# Altium PCB PCB_NEON.PcbDoc
Units mm, origin at the board's own origin, x right, y up, seen from the top; angles counter-clockwise.
Board outline 104.88 x 70.78 mm, 2 copper layers (Top Layer, Bottom Layer); 56 components, 30 nets, 168 pads, 63 vias.
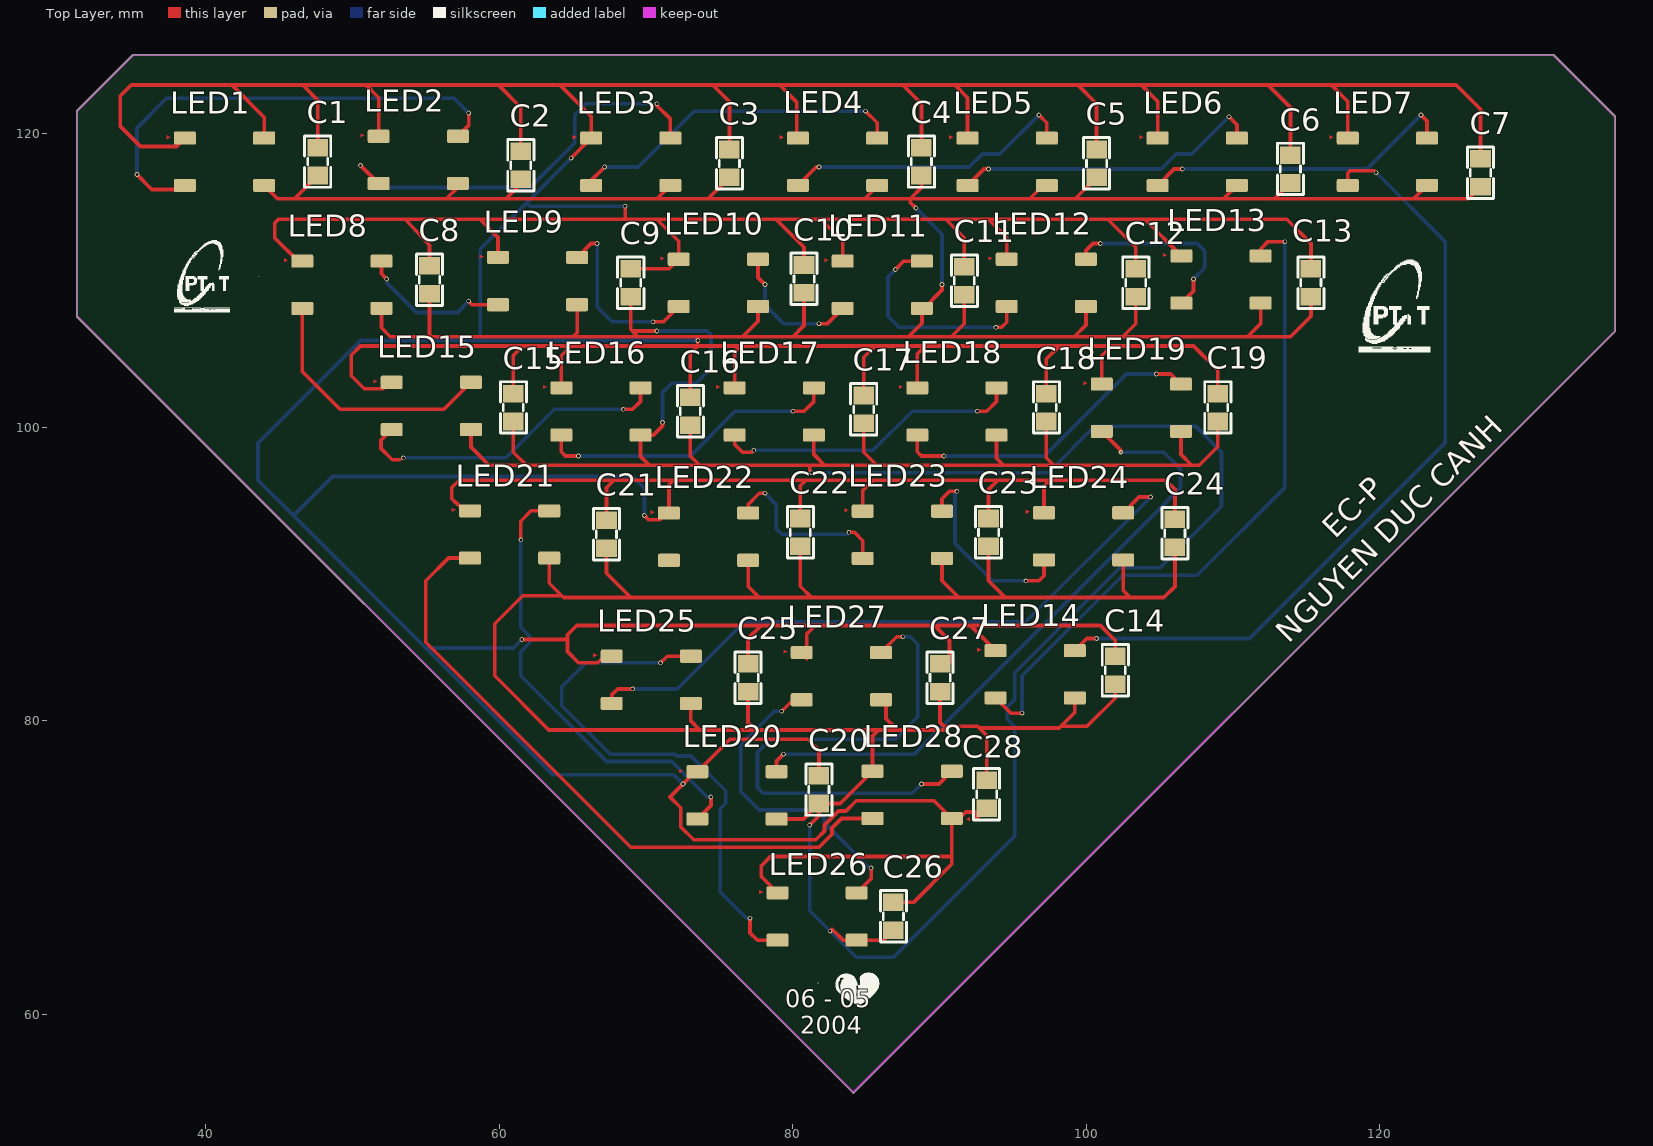
[diagram p0: Top Layer view]
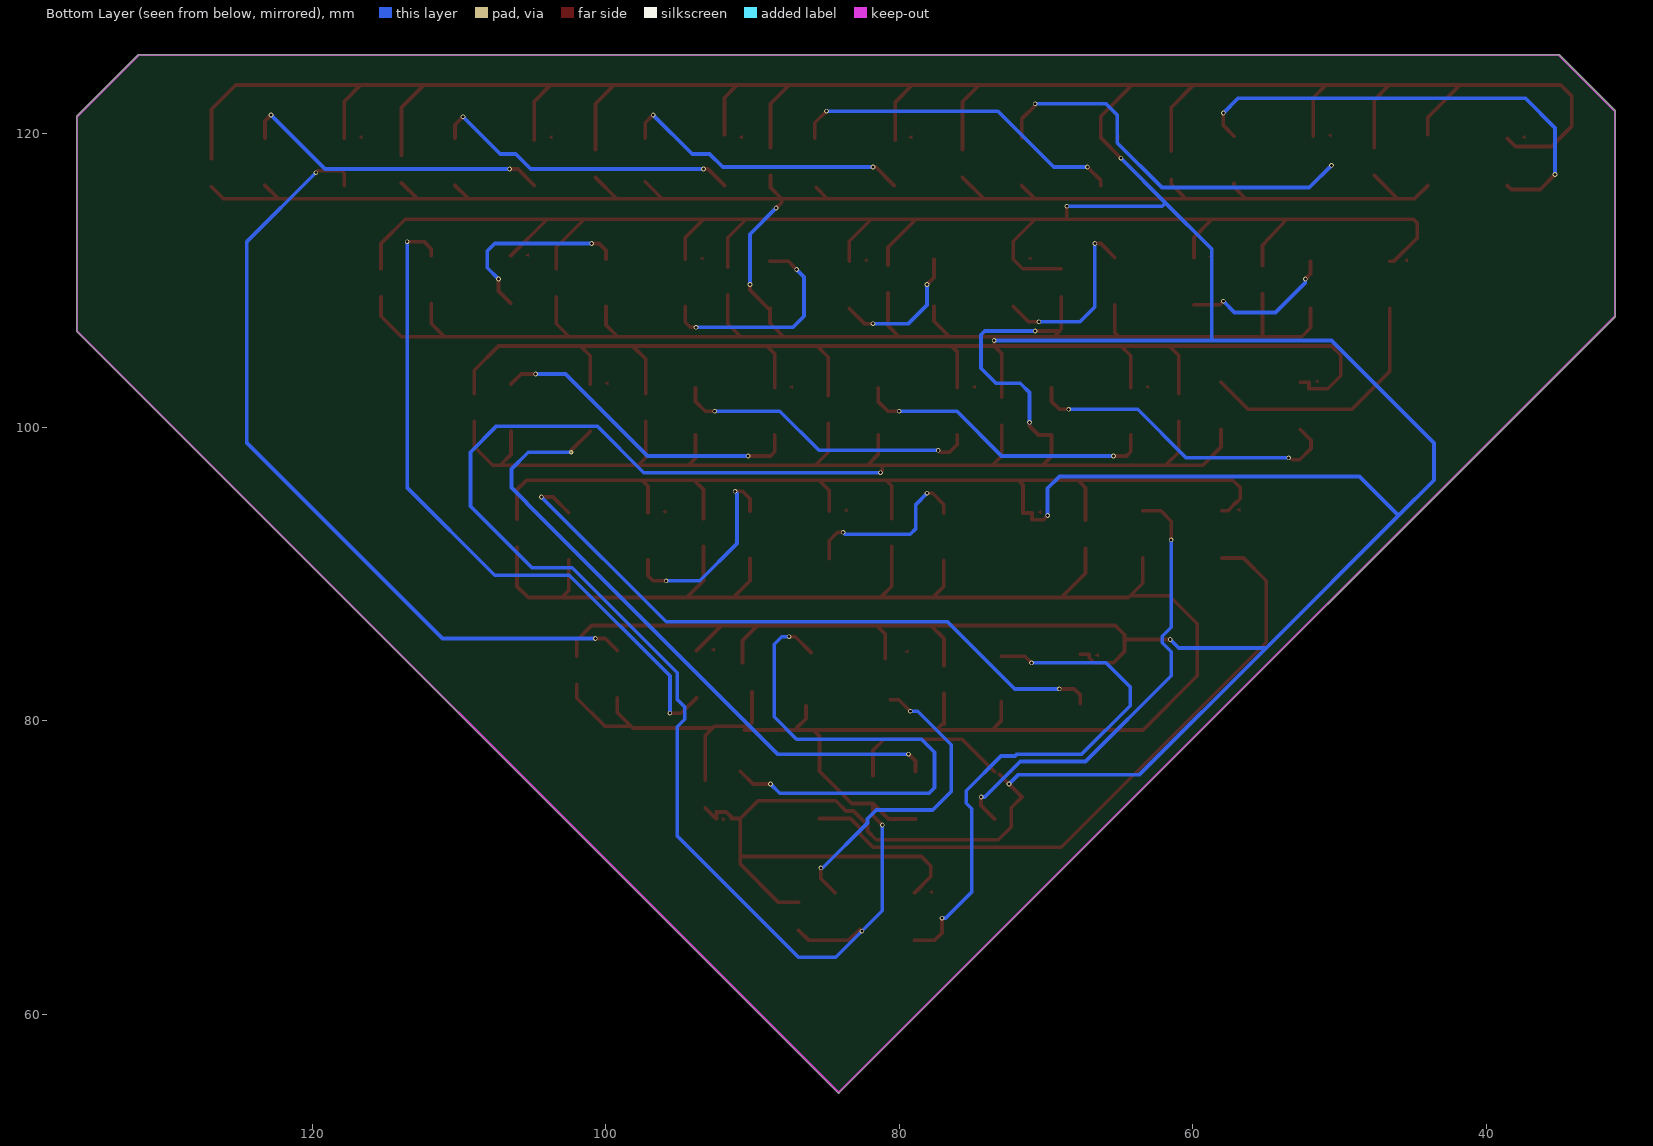
[diagram p1: Bottom Layer view, seen from below]
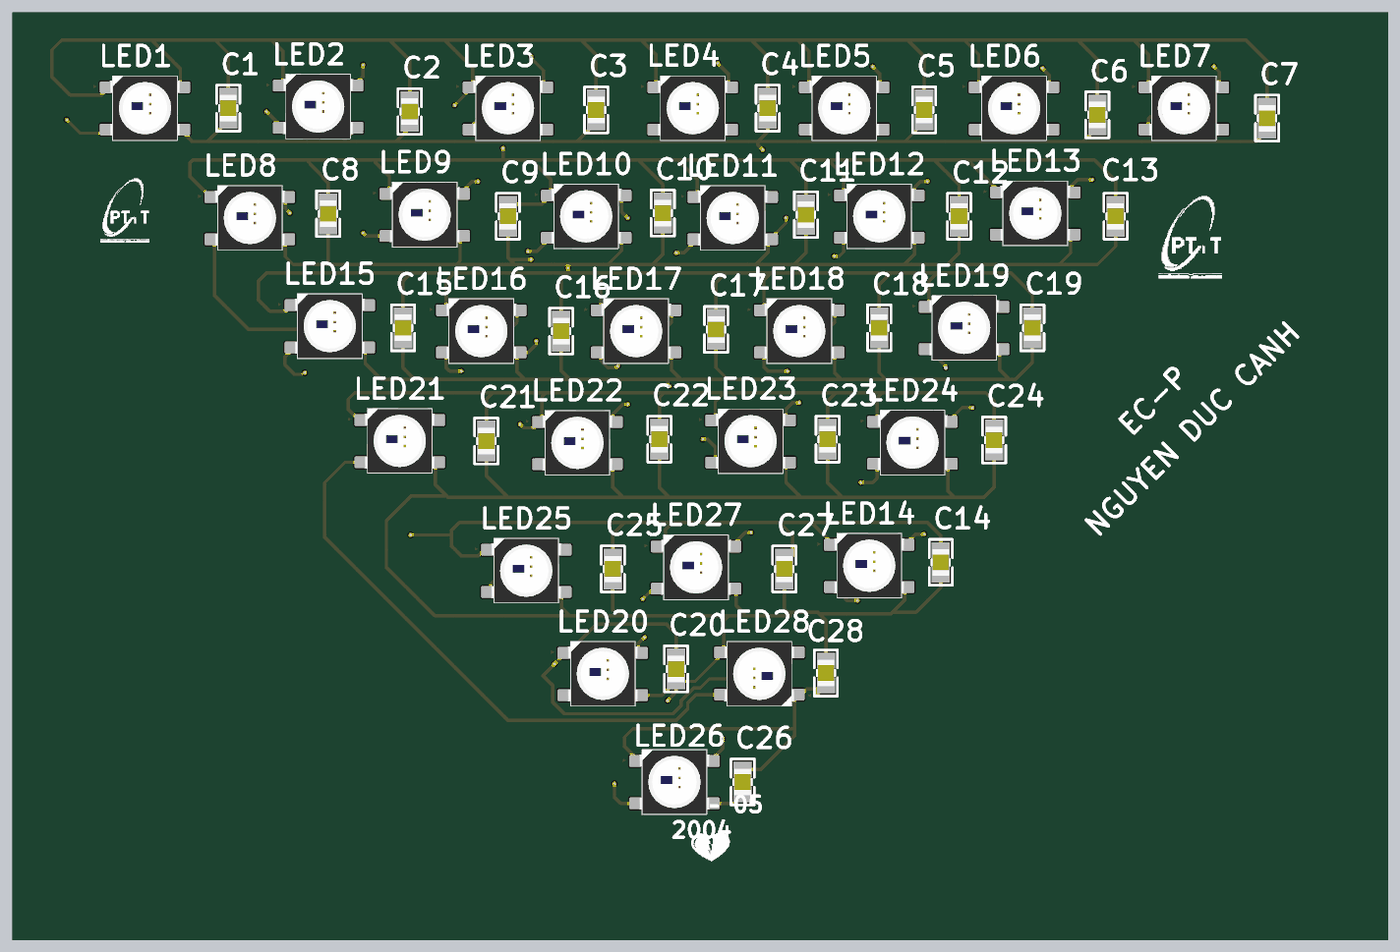
[diagram p2: 3D render of the assembled board from above, using the file's embedded part models]

## Layer stack, top to bottom
Top Solder: solder mask 0.0102, Solder Resist, Dk 3.5
Top Layer: signal copper 0.0356
Dielectric 1: dielectric 0.32, FR-4, Dk 4.8
Bottom Layer: signal copper 0.0356
Bottom Solder: solder mask 0.0102, Solder Resist, Dk 3.5

## Board outline
70.449,68.291 ccw(c70.485,68.326) 70.449,68.29 ccw(c70.485,68.326) 70.45,68.29 84.102,54.638 ccw(c84.138,54.673) 84.173,54.638 136.053,106.517 136.052,106.517 ccw(c136.017,106.553) 136.067,106.553 136.067,121.158 ccw(c136.017,121.158) 136.052,121.194 136.053,121.194 131.862,125.385 131.862,125.384 ccw(c131.826,125.349) 131.826,125.399 35.052,125.399 ccw(c35.052,125.349) 35.016,125.384 35.016,125.385 31.206,121.575 31.207,121.575 ccw(c31.242,121.539) 31.192,121.539 31.192,107.569 ccw(c31.242,107.569) 31.207,107.533 31.206,107.533

## Design rules (kind name [scope] priority, off if disabled: settings)
Clearance [All] p1: gap=0.254 ignorepadtopadclearanceinfootprint=FALSE except(0: Arc-Hole Track-Hole SMDPad-Hole THPad-Hole Via-Hole Fill-Hole Poly-Hole Region-Hole Text-Hole)
PolygonConnect [All] p1: connectstyle=Relief reliefconductorwidth=0.254 reliefentries=4 polygonreliefangle="90 Angle" airgapwidth=0.254
RoutingVias [All] p1: holewidth=0.711 width=1.27 viastyle="Through Hole" minholewidth=0.711 minwidth=1.27 maxholewidth=0.711 maxwidth=1.27
SolderMaskExpansion [All] p1: expansion=0.102 istentingtop=FALSE
Width [All] p1: maxlimit=0.254 minlimit=0.254 preferedwidth=0.254
30 further rules are at their usual default settings.

## Components (designator, comment, footprint, x,y, rotation, side; value= is the part's Value field where it differs from the comment)
C1 "104" "tu 0805" 47.625,118.11 r270 top
C2 "104" "tu 0805" 61.468,117.856 r270 top
C3 "104" "tu 0805" 75.692,117.983 r270 top
C4 "104" "tu 0805" 88.773,118.11 r270 top
C5 "104" "tu 0805" 100.711,117.983 r270 top
C6 "104" "tu 0805" 113.919,117.602 r270 top
C7 "104" "tu 0805" 126.873,117.348 r270 top
C8 "104" "tu 0805" 55.248,110.052 r270 top
C9 "104" "tu 0805" 68.961,109.855 r270 top
C10 "104" "tu 0805" 80.772,110.109 r270 top
C11 "104" "tu 0805" 91.694,109.982 r270 top
C12 "104" "tu 0805" 103.378,109.855 r270 top
C13 "104" "tu 0805" 115.316,109.855 r270 top
C14 "104" "tu 0805" 101.981,83.439 r270 top
C15 "104" "tu 0805" 60.96,101.346 r270 top
C16 "104" "tu 0805" 73.025,101.092 r270 top
C17 "104" "tu 0805" 84.836,101.219 r270 top
C18 "104" "tu 0805" 97.282,101.346 r270 top
C19 "104" "tu 0805" 108.966,101.346 r270 top
C20 "104" "tu 0805" 81.788,75.311 r270 top
C21 "104" "tu 0805" 67.31,92.71 r270 top
C22 "104" "tu 0805" 80.518,92.837 r270 top
C23 "104" "tu 0805" 93.345,92.837 r270 top
C24 "104" "tu 0805" 106.048,92.78 r270 top
C25 "104" "tu 0805" 76.962,82.931 r270 top
C26 "104" "tu 0805" 86.868,66.675 r270 top
C27 "104" "tu 0805" 90.043,82.931 r270 top
C28 "104" "tu 0805" 93.215,74.992 r90 top
LED1 "WS2812B" LED 41.275,117.602 r0 top
LED2 "WS2812B" LED 54.483,117.729 r0 top
LED3 "WS2812B" LED 68.961,117.602 r0 top
LED4 "WS2812B" LED 83.058,117.602 r0 top
LED5 "WS2812B" LED 94.615,117.602 r0 top
LED6 "WS2812B" LED 107.569,117.602 r0 top
LED7 "WS2812B" LED 120.523,117.602 r0 top
LED8 "WS2812B" LED 49.276,109.22 r0 top
LED9 "WS2812B" LED 62.611,109.474 r0 top
LED10 "WS2812B" LED 74.93,109.347 r0 top
LED11 "WS2812B" LED 86.106,109.22 r0 top
LED12 "WS2812B" LED 97.282,109.347 r0 top
LED13 "WS2812B" LED 109.187,109.578 r0 top
LED14 "WS2812B" LED 96.52,82.677 r0 top
LED15 "WS2812B" LED 55.372,100.965 r0 top
LED16 "WS2812B" LED 66.929,100.584 r0 top
LED17 "WS2812B" LED 78.74,100.584 r0 top
LED18 "WS2812B" LED 91.186,100.584 r0 top
LED19 "WS2812B" LED 103.759,100.838 r0 top
LED20 "WS2812B" LED 76.2,74.422 r0 top
LED21 "WS2812B" LED 60.706,92.202 r0 top
LED22 "WS2812B" LED 74.262,92.052 r0 top
LED23 "WS2812B" LED 87.47,92.179 r0 top
LED24 "WS2812B" LED 99.822,92.075 r0 top
LED25 "WS2812B" LED 70.358,82.296 r0 top
LED26 "WS2812B" LED 81.661,66.167 r0 top
LED27 "WS2812B" LED 83.312,82.55 r0 top
LED28 "WS2812B" LED 88.138,75.438 r180 top

## Footprints (in the part's own frame and the unit in brackets; to place one, negate y for a bottom-side part, rotate by r counter-clockwise, add the part's x,y. Pads: shape width x height; smd on the part's side, far side on the other; paste and mask are expansions set on the pad)
LED [mm]
  rrect25% 1.5x0.9 smd: 1(-2.7,2.1) 2(-2.7,-1.12) 3(2.7,-1.12) 4(2.7,2.1)
  Top Layer region: -3.937,2.286 -3.937,2.032 -3.683,2.159
  body extent -2.7,-1.99 2.7,3.01, height 1.8
"tu 0805" [mm] "Compoment SMD 80x50mil"
  rect 1.2x1.4 smd: 1(-0.946,-0.003) 2(0.954,-0.003)
  silkscreen extent -1.75,-0.89 1.75,0.89, body extent -1.01,-0.64 1.01,0.63, height 0.61

## Part data
C1 C2 C3 C4 C5 C6 C7 C8 C9 C10 C11 C12 C13 C14 C15 C16 C17 C18 C19 C20 C21 C22 C23 C24 C25 C26 C27 C28: library part "Tu 0805 104 50V 10%", "Dán", Chung_Loai=Dán, Don_Vi=Con, Ma_Hang=MH004551, So_Chan=2, Ten_Linh_Kien="T? 0805 104-100nF 10% 50V"

## Via types
v1: diameter 0.32, hole 0.2, Top Layer to Bottom Layer, 62 vias
v2: diameter 0.32, hole 0, Top Layer to Bottom Layer, 1 vias

## Nets (pads, with @x,y where several pads share a name; then routed paths per layer and width w, separated by ;. In a path a pad name is that pad's centre, name@x,y a point inside that pad or via, vN(x,y) a via of type N, cw(c..) or ccw(c..) an arc to the next point about the centre after c; other vN are vias at no path point)
5V+: C1.1 C2.1 C3.1 C4.1 C5.1 C6.1 C7.1 C8.1 C9.1 C10.1 C11.1 C12.1 C13.1 C14.1 C15.1 C16.1 C17.1 C18.1 C19.1 C20.1 C21.1 C22.1 C23.1 C24.1 C25.1 C26.1 C27.1 C28.1 LED1.1 LED1.4 LED2.1 LED3.1 LED4.1 LED5.1 LED6.1 LED7.1 LED8.1 LED9.1 LED10.1 LED11.1 LED12.1 LED13.1 LED14.1 LED15.1 LED16.1 LED17.1 LED18.1 LED19.1 LED20.1 LED21.1 LED22.1 LED23.1 LED24.1 LED25.1 LED26.1 LED27.1 LED28.1 | length 694.4
  Top Layer w0.254: LED1.1 37.999,119.126 35.56,119.126 34.163,120.523 34.163,122.555 34.925,123.317 41.783,123.317 ; LED1.4@43.975,119.956 43.975,121.125 41.783,123.317 ; LED8.1 46.287,111.32 44.704,112.903 44.704,113.919 44.958,114.173 53.594,114.173 ; C1.1 47.622,122.304 46.609,123.317 ; LED2.1 51.783,122.461 50.927,123.317 ; LED15.1 52.07,103.065 52.07,102.616 50.8,102.616 49.911,103.505 49.911,104.902 50.546,105.537 61.595,105.537 ; C8.1 55.245,112.395 53.594,114.173 ; LED21.1 57.59,94.302 57.404,94.488 57.404,94.519 57.054,94.869 57.023,94.869 56.769,95.123 56.769,95.885 57.277,96.393 67.818,96.393 ; LED9.1 59.911,112.936 58.801,114.046 58.801,114.173 ; C15.1 60.957,104.899 61.595,105.537 ; C2.1 61.465,121.796 59.944,123.317 ; v1(61.531,85.534) 64.643,85.534 ; LED16.1 64.229,104.869 64.897,105.537 ; v1(64.897,118.338) LED3.1 66.261,121.191 64.135,123.317 ; C21.1 67.307,95.882 67.818,96.393 ; LED25.1@67.658,84.523 67.056,84.523 67.056,84.297 66.706,83.947 65.405,83.947 64.643,84.709 64.643,85.534 ; v1(68.58,115.062) 68.58,114.173 ; C9.1 71.584,110.801 LED10.1 72.23,112.682 70.739,114.173 ; v1(69.89,93.98) 70.167,93.703 70.96,93.703 70.96,94.152 LED22.1 71.562,96.073 71.882,96.393 ; C16.1 73.022,105.026 73.533,105.537 ; LED20.1@73.185,76.36 v1(72.517,75.692) 71.628,74.803 72.369,74.062 72.369,72.76 73.247,71.882 81.574,71.882 82.169,72.477 82.169,72.902 83.113,73.846 83.625,73.846 84.328,74.549 89.627,74.549 LED28.1 ; LED20.1 75.718,78.74 81.026,78.74 81.785,77.981 C20.1 ; v1(73.533,105.918) 73.533,105.537 ; C3.1 75.689,122.177 74.549,123.317 ; LED17.1 76.04,105.123 76.454,105.537 ; C25.1@76.959,83.75 C25.1 76.959,85.595 77.851,86.487 ; LED26.1 77.851,69.377 77.851,70.104 78.486,70.739 90.838,70.739 ; LED4.1@80.264,119.552 80.264,122.174 79.121,123.317 ; C22.1 80.515,96.009 80.899,96.393 ; C10.1 80.769,112.271 78.867,114.173 ; LED27.1@80.96,84.246 80.96,85.913 81.534,86.487 ; LED11.1 83.406,112.682 81.915,114.173 ; LED23.1 84.77,95.692 85.471,96.393 ; C17.1 84.833,104.772 85.598,105.537 ; C26.1 88.228,67.621 90.838,70.231 90.838,70.739 ; LED18.1 88.486,104.996 89.027,105.537 ; C4.1 88.77,122.05 87.503,123.317 ; C27.1@90.678,83.942 90.678,85.471 89.662,86.487 ; C11.1 91.691,112.906 90.424,114.173 ; LED5.1@91.915,119.956 91.915,122.461 91.059,123.317 ; C28.1 92.51,73.338 92.456,73.338 92.456,73.787 91.79,73.787 91.44,73.437 91.44,73.338 LED28.1 ; C23.1 93.342,95.755 93.98,96.393 ; LED14.1 92.11,86.487 ; LED12.1 94.582,112.936 93.345,114.173 ; LED24.1 97.122,95.979 97.536,96.393 ; C18.1 97.279,104.645 98.171,105.537 ; C5.1 100.708,122.05 99.441,123.317 ; LED19.1 101.059,104.869 101.727,105.537 ; C14.1 101.978,85.474 100.965,86.487 92.11,86.487 ; C12.1 103.375,112.271 101.473,114.173 ; LED6.1@104.869,119.575 LED6.1 104.869,122.207 103.759,123.317 ; C24.1 106.045,95.758 105.41,96.393 97.536,96.393 ; LED13.1 103.992,114.173 ; C19.1 108.963,103.889 107.315,105.537 101.727,105.537 ; C6.1 113.916,121.796 112.395,123.317 ; C13.1 115.313,112.525 113.665,114.173 103.992,114.173 ; LED7.1 117.823,122.207 116.713,123.317 ; C7.1 126.87,121.669 125.222,123.317 116.713,123.317 ; 41.783,123.317 46.609,123.317 ; 46.609,123.317 50.927,123.317 ; 50.927,123.317 59.944,123.317 ; 53.594,114.173 58.801,114.173 ; 58.801,114.173 68.58,114.173 ; 59.944,123.317 64.135,123.317 ; 61.595,105.537 64.897,105.537 ; 64.135,123.317 74.549,123.317 ; 64.643,85.534 64.643,85.852 65.278,86.487 77.851,86.487 ; 64.897,105.537 73.533,105.537 ; 67.818,96.393 71.882,96.393 ; 68.58,114.173 70.739,114.173 ; 70.739,114.173 78.867,114.173 ; 71.882,96.393 80.899,96.393 ; 73.533,105.537 76.454,105.537 ; 74.549,123.317 79.121,123.317 ; 76.454,105.537 85.598,105.537 ; 77.851,86.487 81.534,86.487 ; 78.867,114.173 81.915,114.173 ; 79.121,123.317 87.503,123.317 ; 80.899,96.393 85.471,96.393 ; 81.534,86.487 89.662,86.487 ; 81.915,114.173 90.424,114.173 ; 85.471,96.393 93.98,96.393 ; 85.598,105.537 89.027,105.537 ; 87.503,123.317 91.059,123.317 ; 89.027,105.537 98.171,105.537 ; 89.662,86.487 92.11,86.487 ; 90.424,114.173 93.345,114.173 ; 90.838,70.739 LED28.1 ; 91.059,123.317 99.441,123.317 ; 93.345,114.173 101.473,114.173 ; 93.98,96.393 97.536,96.393 ; 98.171,105.537 101.727,105.537 ; 99.441,123.317 103.759,123.317 ; 101.473,114.173 103.992,114.173 ; 103.759,123.317 112.395,123.317 ; 112.395,123.317 116.713,123.317
  Bottom Layer w0.254: v1(61.531,85.534) 60.96,84.963 54.991,84.963 ; v1(64.897,118.338) 61.849,115.29 ; v1(68.58,115.062) 62.077,115.062 61.849,115.29 ; v1(69.89,93.98) 69.89,95.845 69.088,96.647 48.641,96.647 45.974,93.98 ; v1(72.517,75.692) 71.882,76.327 63.627,76.327 54.991,84.963 ; v1(73.533,105.918) 58.801,105.918 ; 45.974,93.98 43.561,96.393 43.561,98.933 50.546,105.918 58.801,105.918 ; 45.974,93.98 54.991,84.963 ; 58.801,105.918 58.7,106.019 58.7,112.141 61.849,115.29
Do: LED22.2
GND: C1.2 C2.2 C3.2 C4.2 C5.2 C6.2 C7.2 C8.2 C9.2 C10.2 C11.2 C12.2 C13.2 C14.2 C15.2 C16.2 C17.2 C18.2 C19.2 C20.2 C21.2 C22.2 C23.2 C24.2 C25.2 C26.2 C27.2 C28.2 LED1.3 LED2.3 LED3.3 LED4.3 LED5.3 LED6.3 LED7.3 LED8.3 LED9.3 LED10.3 LED11.3 LED12.3 LED13.3 LED14.3 LED15.3 LED16.3 LED17.3 LED18.3 LED19.3 LED20.3 LED21.3 LED22.3 LED23.3 LED24.3 LED25.3 LED26.3 LED27.3 LED28.3 | length 544.8
  Top Layer w0.254: LED1.3 44.887,115.57 46.036,115.57 ; C1.2 46.036,115.57 ; LED8.3 51.976,106.774 52.578,106.172 55.245,106.172 ; C8.2 55.245,106.172 ; LED2.3 57.183,116.365 56.388,115.57 ; LED15.3 58.072,98.646 59.309,97.409 61.849,97.409 ; C15.2 60.957,98.301 61.849,97.409 ; C2.2 61.465,116.583 60.452,115.57 ; LED21.3 63.406,89.375 64.262,88.519 ; LED9.3 65.311,106.459 65.024,106.172 ; C21.2 67.307,90.046 68.961,88.392 ; C9.2 68.958,106.683 69.088,106.553 ; v1(70.739,106.553) 69.088,106.553 ; v1(71.12,100.33) 71.12,100.076 70.508,99.464 LED16.3 69.629,98.011 70.231,97.409 ; LED3.3 70.749,115.57 ; C16.2 73.022,98.047 73.66,97.409 ; LED25.3@73.058,81.303 LED25.3 73.058,79.977 73.66,79.375 ; C3.2 74.23,115.57 ; C25.2@76.959,81.85 76.959,79.759 77.086,79.759 77.47,79.375 ; LED22.3 76.962,89.154 77.724,88.392 ; LED10.3 77.63,107.221 76.581,106.172 ; LED20.3 80.73,73.302 C20.2 ; C22.2 80.515,89.157 81.28,88.392 ; C10.2 80.769,106.931 80.01,106.172 ; v1(81.153,72.898) 81.785,73.53 C20.2 ; v1(81.28,96.901) 81.153,97.028 81.153,97.409 ; LED17.3 81.44,98.138 82.169,97.409 ; 82.677,65.786 83.416,65.047 LED26.3 86.191,65.047 C26.2 ; C17.2 84.833,98.301 85.725,97.409 ; LED4.3@85.664,116.332 84.902,115.57 ; LED27.3@86.36,81.026 86.36,80.137 86.995,79.502 86.995,79.375 ; v1(88.392,114.935) 88.011,115.316 88.011,115.57 ; C4.2 88.77,116.329 88.011,115.57 ; C27.2 90.04,79.886 90.295,79.631 ; LED23.3 90.17,89.535 91.313,88.392 ; v1(90.17,109.728) 90.17,109.347 88.923,108.1 LED11.3 88.806,107.094 87.884,106.172 ; C11.2 91.691,107.058 90.805,106.172 ; C28.2 93.218,78.996 92.712,79.502 ; C23.2 93.342,89.538 94.488,88.392 ; LED18.3 93.886,97.884 94.361,97.409 ; C18.2 97.279,97.92 97.79,97.409 ; LED5.3@97.315,116.736 96.149,115.57 ; LED14.3 99.22,80.553 98.298,79.631 ; LED12.3 99.982,106.967 99.187,106.172 ; C5.2 99.249,115.57 ; C14.2 101.978,81.531 100.078,79.631 98.298,79.631 ; LED24.3 102.522,88.867 102.997,88.392 ; C12.2 103.375,107.058 102.489,106.172 ; C24.2 106.045,89.154 105.283,88.392 102.997,88.392 ; LED19.3 106.459,98.138 107.188,97.409 ; C19.2 108.963,98.676 107.696,97.409 107.188,97.409 ; LED6.3 109.357,115.57 ; LED13.3 111.887,107.061 110.998,106.172 ; C6.2 112.838,115.57 ; C13.2 115.313,107.566 113.919,106.172 110.998,106.172 ; LED7.3 122.311,115.57 ; C7.2 126.046,115.57 122.311,115.57 ; 46.036,115.57 56.388,115.57 ; 55.245,106.172 65.024,106.172 ; 56.388,115.57 60.452,115.57 ; 60.452,115.57 70.749,115.57 ; 61.849,97.409 70.231,97.409 ; 64.262,88.519 61.595,88.519 59.69,86.614 59.69,83.058 63.373,79.375 73.66,79.375 ; 64.262,88.519 64.389,88.392 68.961,88.392 ; 65.024,106.172 69.469,106.172 ; 68.961,88.392 77.724,88.392 ; 69.088,106.553 69.469,106.172 ; 69.469,106.172 76.581,106.172 ; 70.231,97.409 73.66,97.409 ; 70.749,115.57 74.23,115.57 ; 73.66,79.375 77.47,79.375 ; 73.66,97.409 81.153,97.409 ; 74.23,115.57 84.902,115.57 ; 76.581,106.172 80.01,106.172 ; 77.47,79.375 85.852,79.375 ; 77.724,88.392 81.28,88.392 ; 80.01,106.172 87.884,106.172 ; 81.153,97.409 82.169,97.409 ; 81.28,88.392 91.313,88.392 ; C20.2 83.237,74.357 LED28.3 85.438,78.961 85.852,79.375 ; 82.169,97.409 85.725,97.409 ; 84.902,115.57 88.011,115.57 ; 85.725,97.409 94.361,97.409 ; 85.852,79.375 86.995,79.375 ; 86.995,79.375 90.551,79.375 90.295,79.631 ; 87.884,106.172 90.805,106.172 ; 88.011,115.57 96.149,115.57 ; 90.295,79.631 92.583,79.631 92.712,79.502 ; 90.805,106.172 99.187,106.172 ; 91.313,88.392 94.488,88.392 ; 92.712,79.502 98.169,79.502 98.298,79.631 ; 94.361,97.409 97.79,97.409 ; 94.488,88.392 102.997,88.392 ; 96.149,115.57 99.249,115.57 ; 97.79,97.409 107.188,97.409 ; 99.187,106.172 102.489,106.172 ; 99.249,115.57 109.357,115.57 ; 102.489,106.172 110.998,106.172 ; 109.357,115.57 112.838,115.57 ; 112.838,115.57 122.311,115.57
  Bottom Layer w0.254: v1(70.739,106.553) 74.168,106.553 74.422,106.299 74.422,104.013 73.406,102.997 71.755,102.997 71.12,102.362 v1(71.12,100.33) ; v1(81.153,72.898) 81.153,67.056 v1(82.55,65.659) 84.328,63.881 86.868,63.881 95.123,72.136 95.123,79.589 94.615,80.097 94.615,80.939 95.123,81.447 95.123,83.268 102.279,90.424 105.029,90.424 109.22,94.615 109.22,98.298 107.442,100.076 100.584,100.076 97.409,96.901 v1(81.28,96.901) ; v1(88.392,114.935) 90.17,113.157 v1(90.17,109.728)
NetLED1_2: LED1.2 LED2.4 | length 32.7
  Top Layer w0.254: v1(35.306,117.221) 36.322,116.205 38.298,116.205 LED1.2 ; LED2.4 57.912,120.558 v1(57.912,121.412)
  Bottom Layer w0.254: v1(35.306,117.221) 35.306,120.396 37.338,122.428 56.896,122.428 v1(57.912,121.412)
NetLED2_2: LED2.2 LED3.4 | length 28.8
  Top Layer w0.254: v1(50.546,117.846) LED2.2 ; v1(70.739,122.047) 70.739,121.92 71.661,120.998 LED3.4
  Bottom Layer w0.254: v1(50.546,117.846) 52.06,116.332 62.103,116.332 65.151,119.38 65.151,121.285 65.913,122.047 v1(70.739,122.047)
NetLED3_2: LED3.2 LED4.4 | length 23.2
  Top Layer w0.254: LED3.2 66.261,116.807 v1(67.183,117.729) ; v1(84.963,121.539) 85.758,120.744 LED4.4
  Bottom Layer w0.254: v1(67.183,117.729) 69.469,117.729 73.279,121.539 v1(84.963,121.539)
NetLED4_2: LED4.2 LED5.4 | length 20.2
  Top Layer w0.254: LED4.2 81.605,117.729 v1(81.788,117.729) ; v1(96.774,121.285) 97.315,120.744 LED5.4
  Bottom Layer w0.254: v1(81.788,117.729) 92.035,117.729 92.924,118.618 94.107,118.618 v1(96.774,121.285)
NetLED5_2: LED5.2 LED6.4 | length 21.4
  Top Layer w0.254: LED5.2 93.035,117.602 v1(93.345,117.602) ; v1(109.728,121.158) 110.269,120.617 LED6.4
  Bottom Layer w0.254: v1(93.345,117.602) 105.116,117.602 106.132,118.618 107.188,118.618 v1(109.728,121.158)
NetLED6_2: LED6.2 LED7.4 | length 21.7
  Top Layer w0.254: LED6.2 105.989,117.602 v1(106.553,117.602) ; v1(122.809,121.285) 123.223,120.871 LED7.4
  Bottom Layer w0.254: v1(106.553,117.602) 119.126,117.602 v1(122.809,121.285)
NetLED7_2: LED7.2 LED14.4 | length 54.2
  Top Layer w0.254: LED14.4 100.041,85.598 v1(100.711,85.598) ; LED7.2 117.823,117.315 117.983,117.475 119.634,117.475
  Bottom Layer w0.254: v1(100.711,85.598) 111.125,85.598 124.46,98.933 124.46,112.649 v1(119.761,117.348)
NetLED8_2: LED8.2 LED15.4 | length 17.6
  Top Layer w0.254: LED8.2 46.576,103.792 49.149,101.219 56.226,101.219 LED15.4
NetLED8_4: LED8.4 LED9.2 | length 10.4
  Top Layer w0.254: LED8.4 51.976,110.457 v1(52.324,110.109) ; v1(57.912,108.585) 58.143,108.354 LED9.2
  Bottom Layer w0.254: v1(52.324,110.109) 52.324,109.855 54.356,107.823 57.15,107.823 v1(57.912,108.585)
NetLED9_4: LED9.4 LED10.2 | length 12.5
  Top Layer w0.254: LED9.4 66.259,112.522 v1(66.675,112.522) ; v1(70.485,107.188) 71.191,107.188 LED10.2
  Bottom Layer w0.254: v1(66.675,112.522) 66.675,108.204 67.691,107.188 v1(70.485,107.188)
NetLED10_4: LED10.4 LED11.2 | length 9.6
  Top Layer w0.254: LED10.4 77.63,110.203 v1(78.105,109.728) ; v1(81.788,107.061) 82.367,107.061 LED11.2
  Bottom Layer w0.254: v1(78.105,109.728) 78.105,108.331 79.375,107.061 v1(81.788,107.061)
NetLED11_4: LED11.4 LED12.2 | length 15.1
  Top Layer w0.254: v1(86.995,110.744) 87.571,111.32 LED11.4 ; v1(93.853,106.807) 94.234,106.807 94.582,107.155 LED12.2
  Bottom Layer w0.254: v1(86.995,110.744) 86.487,110.236 86.487,107.569 87.249,106.807 v1(93.853,106.807)
NetLED12_4: LED12.4 LED13.2 | length 13.3
  Top Layer w0.254: LED12.4 99.982,112.047 100.457,112.522 v1(100.965,112.522) ; LED13.2 107.315,109.286 v1(107.315,110.109)
  Bottom Layer w0.254: v1(100.965,112.522) 107.569,112.522 108.077,112.014 108.077,110.871 v1(107.315,110.109)
NetLED13_4: LED13.4 LED14.2 | length 47.1
  Top Layer w0.254: LED14.2 94.859,80.518 v1(95.631,80.518) ; LED13.4 111.887,112.141 112.395,112.649 v1(113.538,112.649)
  Bottom Layer w0.254: v1(95.631,80.518) 95.631,83.058 102.489,89.916 107.569,89.916 113.538,95.885 v1(113.538,112.649)
NetLED15_2: LED15.2 LED16.4 | length 21.9
  Top Layer w0.254: LED15.2 51.943,99.116 51.943,98.552 52.705,97.79 53.213,97.79 ; v1(68.453,101.219) 69.088,101.219 69.629,101.76 LED16.4
  Bottom Layer w0.254: v1(53.467,97.917) 60.452,97.917 63.754,101.219 v1(68.453,101.219)
NetLED16_2: LED16.2 LED17.4 | length 20.9
  Top Layer w0.254: LED16.2 64.229,98.331 64.516,98.044 v1(65.405,98.044) ; v1(80.01,101.092) 80.772,101.092 81.44,101.76 LED17.4
  Bottom Layer w0.254: v1(65.405,98.044) 73.025,98.044 76.073,101.092 v1(80.01,101.092)
NetLED17_2: LED17.2 LED18.4 | length 20.9
  Top Layer w0.254: LED17.2 76.04,98.839 76.581,98.298 77.216,98.298 ; v1(92.583,101.092) 93.218,101.092 93.886,101.76 LED18.4
  Bottom Layer w0.254: v1(77.343,98.425) 85.471,98.425 88.138,101.092 v1(92.583,101.092)
NetLED18_2: LED18.2 LED19.4 | length 21.8
  Top Layer w0.254: LED18.2 88.486,98.331 88.773,98.044 v1(90.297,98.044) ; v1(104.775,103.632) 105.765,103.632 LED19.4
  Bottom Layer w0.254: v1(90.297,98.044) 97.155,98.044 102.743,103.632 v1(104.775,103.632)
NetLED19_2: LED19.2 LED20.4 | length 43.8
  Top Layer w0.254: LED20.4 78.9,77.249 v1(79.375,77.724) ; LED19.2 102.362,98.415 v2(102.362,98.298)
  Bottom Layer w0.254: v1(79.375,77.724) 88.305,77.724 105.41,94.829 105.41,94.869 106.426,95.885 106.426,97.155 105.283,98.298 v2(102.362,98.298)
NetLED20_2: LED20.2 LED21.4 | length 31.5
  Top Layer w0.254: v1(61.468,92.329) 61.468,93.599 62.171,94.302 LED21.4 ; LED20.2 74.422,74.224 v1(74.422,74.803)
  Bottom Layer w0.254: v1(61.468,92.329) 61.468,86.363 62.072,85.759 62.072,85.31 61.468,84.706 61.468,83.058 67.31,77.216 71.758,77.216 73.058,75.916 73.058,75.913 74.168,74.803 v1(74.422,74.803)
NetLED21_2: LED21.2 LED28.4 | length 45.1
  Top Layer w0.254: LED21.2 56.538,91.082 54.991,89.535 54.991,85.344 68.961,71.374 81.784,71.374 82.677,72.267 82.677,72.692 83.323,73.338 LED28.4
NetLED22_4: LED22.4 LED23.2 | length 12.3
  Top Layer w0.254: LED22.4 76.962,94.742 77.724,95.504 v1(78.105,95.504) ; v1(83.82,92.837) 84.201,92.837 84.77,92.268 LED23.2
  Bottom Layer w0.254: v1(78.105,95.504) 78.867,94.742 78.867,93.091 79.248,92.71 83.693,92.71 v1(83.82,92.837)
NetLED23_4: LED23.4 LED24.2 | length 14
  Top Layer w0.254: LED23.4 90.17,95.123 90.678,95.631 v1(91.186,95.631) ; v1(95.885,89.535) 96.774,89.535 97.122,89.883 LED24.2
  Bottom Layer w0.254: v1(91.186,95.631) 91.059,95.504 91.059,92.075 93.599,89.535 v1(95.885,89.535)
NetLED24_4: LED24.4 LED25.2 | length 45.2
  Top Layer w0.254: LED25.2 67.658,81.755 68.072,82.169 v1(69.088,82.169) ; LED24.4 103.597,95.25 v1(104.394,95.25)
  Bottom Layer w0.254: v1(69.088,82.169) 72.136,82.169 76.708,86.741 95.885,86.741 v1(104.394,95.25)
NetLED25_4: LED25.4 LED26.2 | length 37.4
  Top Layer w0.254: v1(70.993,83.947) 71.442,84.396 LED25.4 ; v1(77.089,66.548) 77.089,65.532 77.574,65.047 LED26.2
  Bottom Layer w0.254: v1(70.993,83.947) 65.913,83.947 64.262,82.296 64.262,81.026 67.564,77.724 71.969,77.724 72.096,77.597 73.065,77.597 75.438,75.224 75.438,74.382 75.057,74.001 75.057,68.326 76.835,66.548 v1(77.089,66.548)
NetLED26_4: LED26.4 LED27.2 | length 21.9
  Top Layer w0.254: v1(79.248,80.645) 80.033,81.43 LED27.2 ; LED26.4 85.344,69.25 v1(85.344,69.977)
  Bottom Layer w0.254: v1(79.248,80.645) 78.74,80.645 76.454,78.359 76.454,75.184 77.724,73.914 81.574,73.914 82.169,73.319 82.169,73.025 85.217,69.977 v1(85.344,69.977)
NetLED27_4: LED27.4 LED28.2 | length 36.5
  Top Layer w0.254: LED27.4 87.087,85.725 v1(87.503,85.725) ; v1(88.773,75.692) 89.972,75.692 LED28.2
  Bottom Layer w0.254: v1(87.503,85.725) 88.011,85.725 88.519,85.217 88.519,80.264 86.995,78.74 78.486,78.74 77.597,77.851 77.597,75.438 77.978,75.057 88.138,75.057 v1(88.773,75.692)

## Keep-outs
Keep-Out Layer:
  lines w0.1: 75.438,125.349 131.826,125.349 136.017,121.158 136.017,106.68 136.017,106.553 84.138,54.673 70.485,68.326 31.242,107.569 31.242,121.539 35.052,125.349 76.581,125.349

## Silkscreen, mask and mechanical layers (free items; w line width, h text height)
Top Overlay:
  drawing of 36 lines, arcs and shapes, not listed
  text "EC-P" at 116.967,92.329 h1.52 r45
  text "NGUYEN DUC CANH" at 113.792,85.217 h1.52 r45
  text "06 - 05  /   2004" at 79.502,58.674 h1.2